# EAGLE board geller_svr_board_clone (EAGLE 7.2.0)
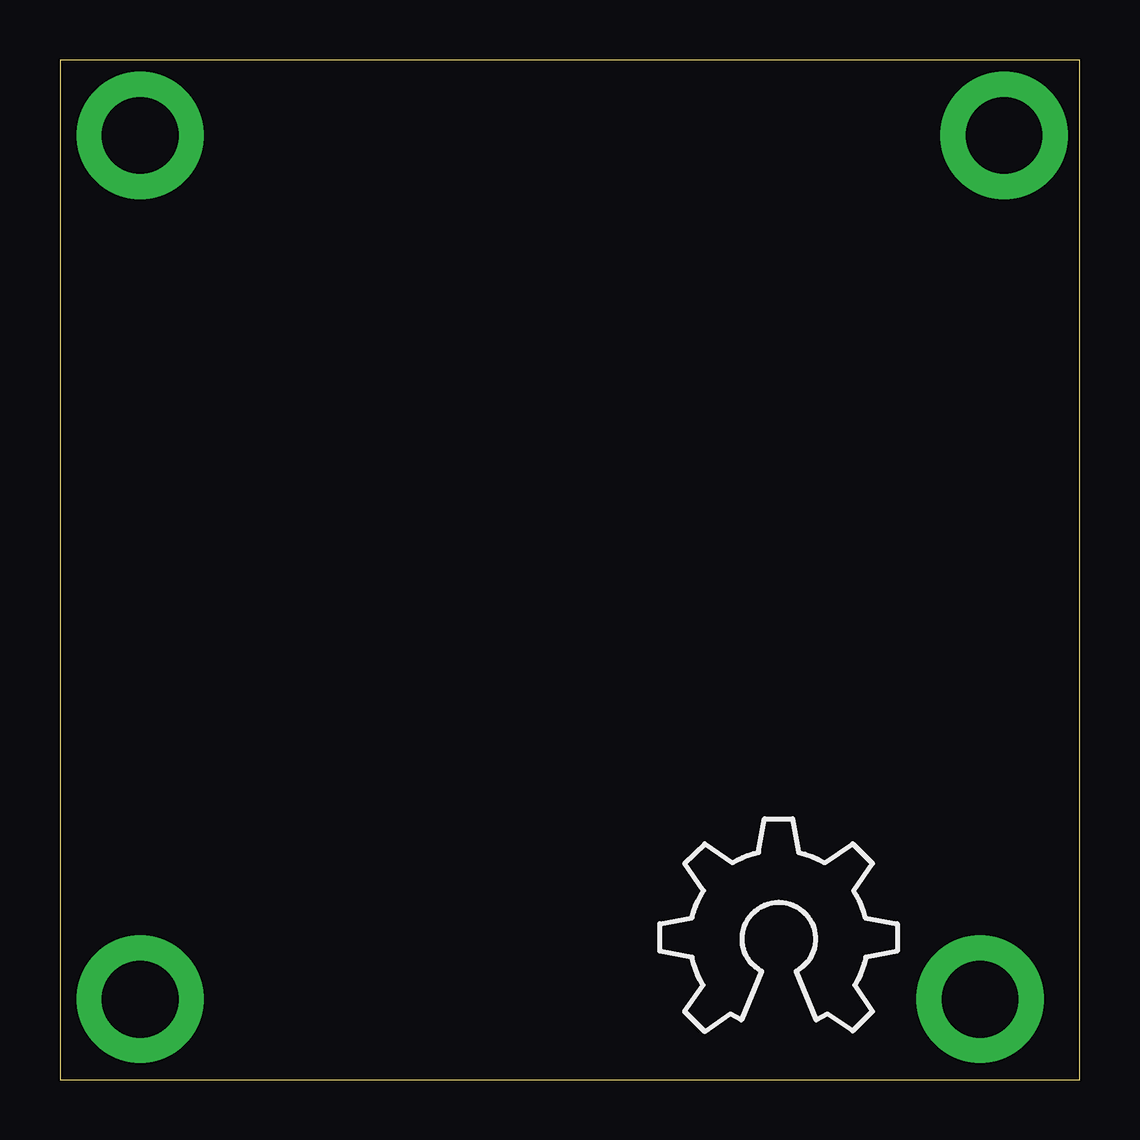
[diagram p0: board, top side]

Size 42.5 x 42.5 mm. Coordinates in mm from the lower left corner, seen from the top.
Outline: 0,0 42.5,0 42.5,42.5 0,42.5 0,0
Copper layers (1*16): Top 0.035mm / dielectric 1.5mm / Bottom 0.035mm
Design rules "default": minimum track width 10mil, minimum drill 24mil, track to track 8mil, track to pad 8mil, pad to pad 8mil, via to via 8mil, smd to smd 8mil, copper to edge 40mil, drill to drill 8mil, minimum pad ring 10mil, minimum via ring 8mil, stop-mask expansion 4mil, vias tented up to drill 0mil, thermal gap 10mil

## Placement (x,y rotation side)
U$1  [OSHW_8X350_NOTEXT]  25,2 0 top

## Library data of the parts
U$1 = ohw-logo

## Tracks (layer width: path | path; a pad name or v marks a point on that pad's centre or on a via)
N$1  (via drill 3.2 pad 5.3)
  other vias: 3.35,3.35
N$2  (via drill 3.2 pad 5.3)
  other vias: 38.35,3.35
N$3  (via drill 3.2 pad 5.3)
  other vias: 39.35,39.35
N$4  (via drill 3.2 pad 5.3)
  other vias: 3.35,39.35